# Altium PCB esp32h2_light_sleep.PcbDoc
Units mm, origin at the board's own origin, x right, y up, seen from the top; angles counter-clockwise.
Board outline 39 x 125 mm, 2 copper layers (Top Layer, Bottom Layer); 49 components, 36 nets, 151 pads, 0 vias.
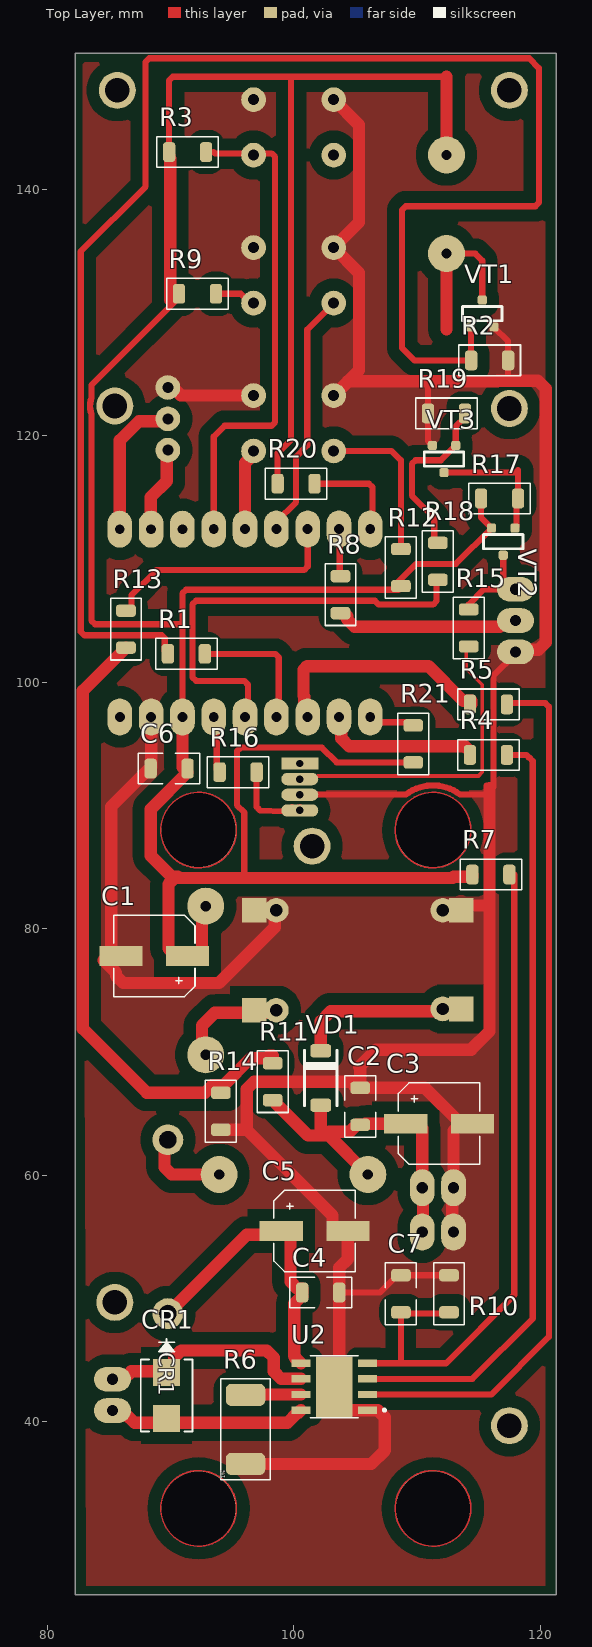
[diagram p0: Top Layer view]
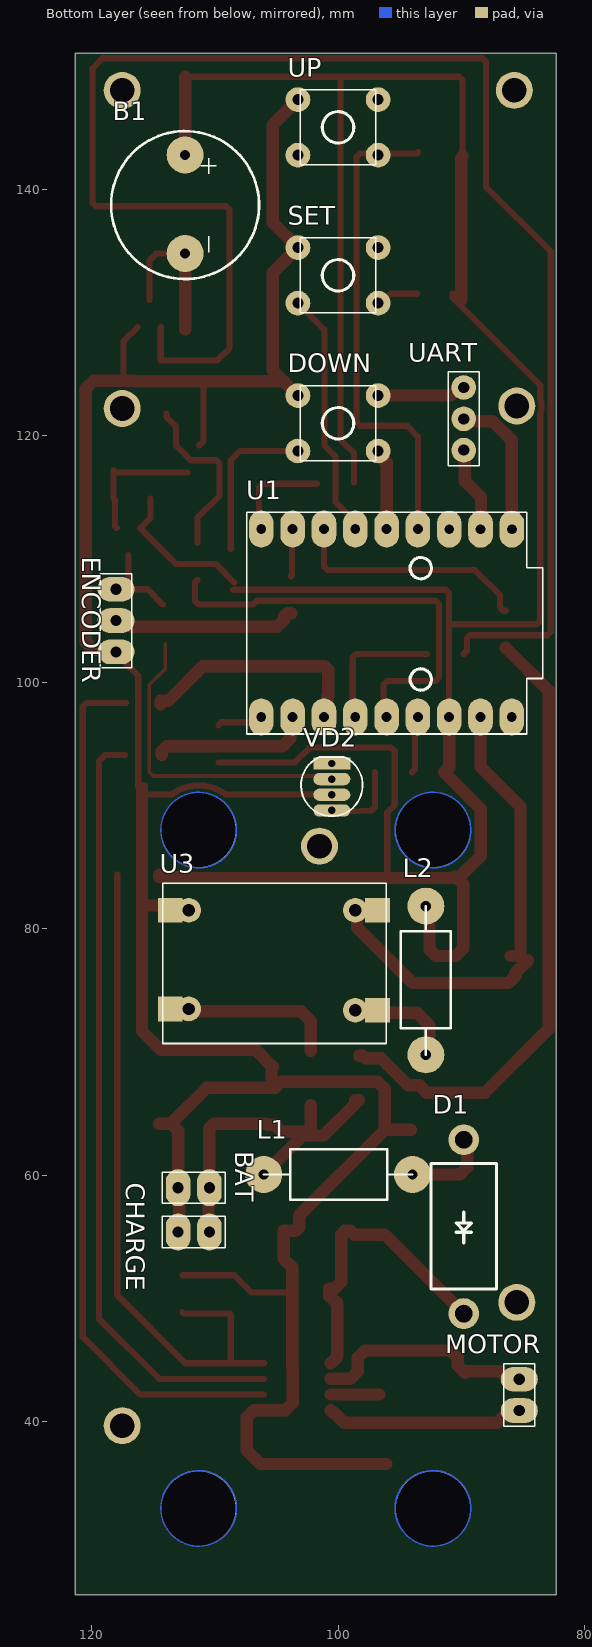
[diagram p1: Bottom Layer view, seen from below]
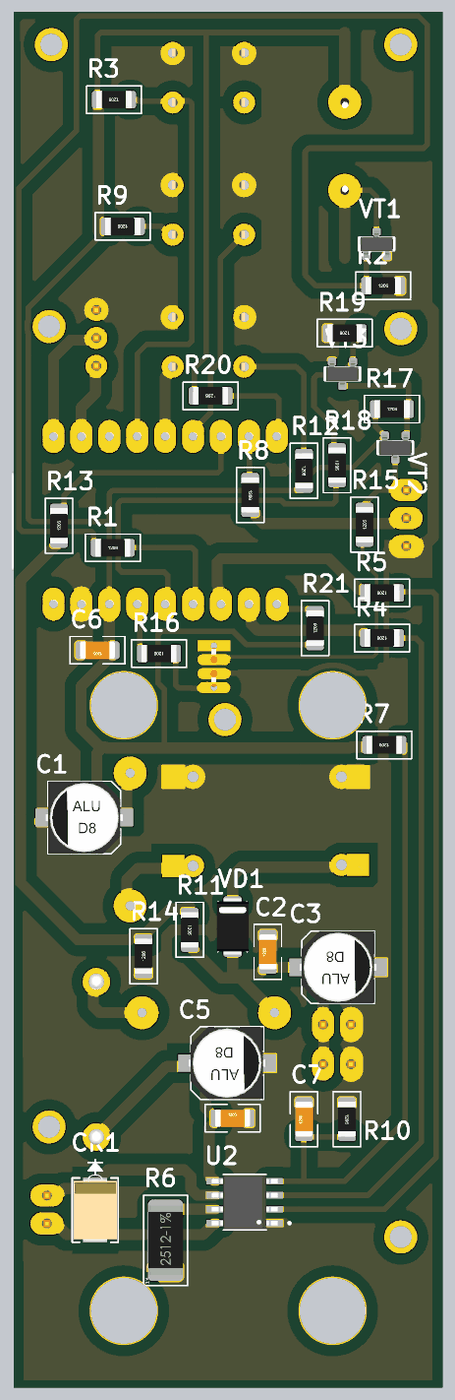
[diagram p2: 3D render of the assembled board from above, using the file's embedded part models]
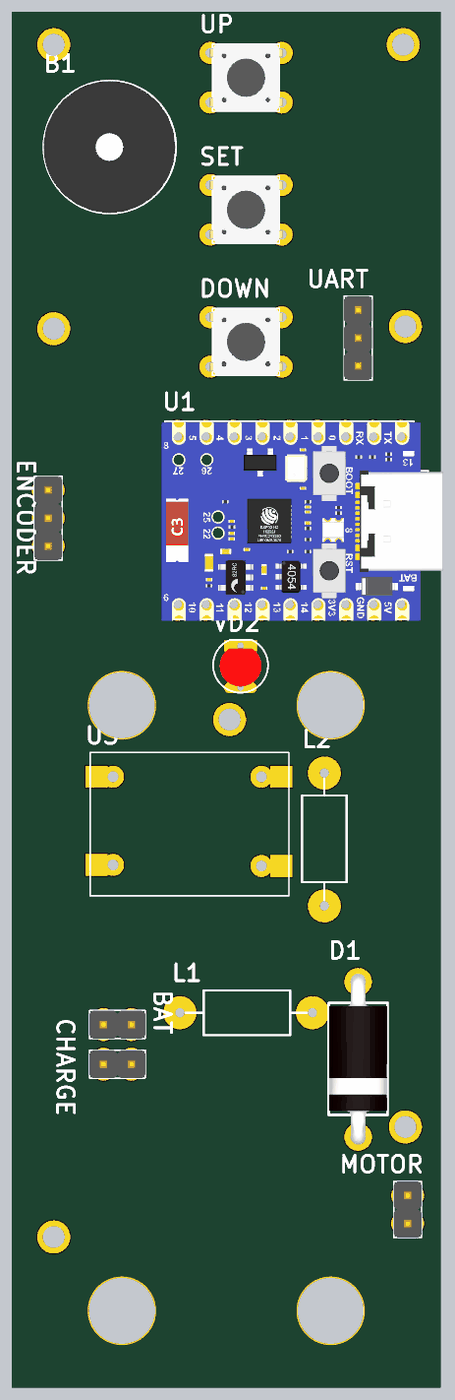
[diagram p3: 3D render of the assembled board from below, using the file's embedded part models]

## Layer stack, top to bottom
Top Solder: solder mask 0.0102, Solder Resist, Dk 3.5
Top Layer: signal copper 0.0356
Dielectric 1: dielectric 0.32, FR-4, Dk 4.8
Bottom Layer: signal copper 0.0356
Bottom Solder: solder mask 0.0102, Solder Resist, Dk 3.5

## Board outline
82.3,26 82.3,151 121.3,151 121.3,26

## Design rules (kind name [scope] priority, off if disabled: settings)
Clearance [All] p1: gap=0.254 ignorepadtopadclearanceinfootprint=FALSE except(1: Arc-Fill Arc-Poly Arc-Region Track-Fill Track-Poly Track-Region SMDPad-Fill SMDPad-Poly SMDPad-Region THPad-Fill THPad-Poly THPad-Region Via-Fill Via-Poly Via-Region Fill-Fill Fill-Poly Fill-Region Poly-Poly Poly-Region Region-Region)
PolygonConnect [All] p1: connectstyle=Direct reliefconductorwidth=0.254 reliefentries=4 polygonreliefangle="90 Angle" airgapwidth=0.254
RoutingVias [All] p1: holewidth=0.711 width=1.27 viastyle="Through Hole" minholewidth=0.711 minwidth=1.27 maxholewidth=0.711 maxwidth=1.27
SolderMaskExpansion [All] p1: expansion=0.102 istentingtop=FALSE
SupplyNets "Schematic Supply Nets" [InNet('GND')] p1: voltage=0.000
Width [All] p1: maxlimit=1 minlimit=0.254 preferedwidth=0.5 bottomlayer_maxwidth=0.254 bottomlayer_prefwidth=0.254 minimp=50.000000 maximp=50.000000 favimp=50.000000
30 further rules are at their usual default settings.

## Components (designator, comment, footprint, x,y, rotation, side; value= is the part's Value field where it differs from the comment)
B1 "Пищалка2TMB12A01" Buzzer_TMB12AXX 112.4,138.7 r270 bottom value=TMB12A01
BAT "H-1x2" J1x2 111.7,59 r180 bottom
C1 "100u" "EL SMD Case D D6.3x6.6 h7.7(0605)" 88.7,77.8 r180 top
C2 "100n" C1206(3216) 105.4,65.6 r90 top
C3 "100u" "EL SMD Case D D6.3x6.6 h7.7(0605)" 111.8,64.2 r0 top
C4 "100n" C1206(3216) 102.2,50.5 r0 top
C5 "100u" "EL SMD Case D D6.3x6.6 h7.7(0605)" 101.7,55.5 r0 top
C6 "100n" C1206(3216) 89.9,93 r180 top
C7 "100n" C1206(3216) 108.7,50.4 r90 top
CHARGE "H-1x2" J1x2 111.7,55.4 r180 bottom
CR1 "SMBJ15CA" DIODE_DO214AA 89.7,42.146 r270 top
D1 "1N5822" DO201AD 89.8,55.9 r0 bottom
DOWN "TS-06" TS-06 100,121 r270 bottom
ENCODER "H-1x3" J1x3#1 118,105 r90 bottom
L1 "" AXIAL-10x0.8 99.8,60.2 r180 bottom value=10mH
L2 "Inductor" AXIAL-10x0.8 93,76 r90 bottom value=10mH
MOTOR "H-1x2" J1x2 85.3,42.2 r90 bottom
R1 "100" R1206 91.3,102.3 r0 top
R2 "100k" R1206 115.9,126.1 r0 top
R3 "100k" R1206 91.4,143 r180 top
R4 "1k" R1206 115.8,94.1 r180 top
R5 "1k" R1206 115.8,98.2 r180 top
R6 "0.2" R2512-1% 96.1,39.4 r90 top
R7 "220k" R1206 116,84.4 r180 top
R8 "100" R1206 103.8,107.1 r270 top
R9 "100k" R1206 92.2,131.5 r180 top
R10 "100k" R1206 112.6,50.4 r270 top
R11 "1M" R1206 98.3,67.6 r270 top
R12 "100k" R1206 108.7,109.3 r270 top
R13 "1k" R1206 86.4,104.3 r90 top
R14 "47k" R1206 94.1,65.2 r90 top
R15 "0" R1206 114.2,104.4 r90 top
R16 "1k" R1206 95.5,92.7 r180 top
R17 "100k" R1206 116.7,114.9 r0 top
R18 "1k" R1206 111.7,109.8 r270 top
R19 "100k" R1206 112.4,121.8 r180 top
R20 "10k" R1206 100.2,116.1 r180 top
R21 "100k" R1206 109.7,95 r90 top
SET "TS-06" TS-06 100,133 r270 bottom
U1 "ESP32-H2_SuperMini" ESP32-H2_SuperMini 95.8,104.8 r270 bottom
U2 "DRV8870DDAR" VREG_LM5017MR/NOPB 103.3,42.865 r180 top
U3 "S08 DC-DC module" "S08 DC-DC module" 106.2,71.7 r180 bottom
UART "H-1x3" J1x3#2 89.8,121.36 r270 bottom
UP "TS-06" TS-06 100,145 r270 bottom
VD1 "SS14" SMA 102.2,67.9 r0 top
VD2 "XT1511-4020" "WS2812D-F5 DIP 4 pin" 100.5,92.14 r270 bottom value=WS2812D-F5
VT1 "IRLML2402TR" SOT-23 115.3,129.9 r0 top
VT2 "IRLML2244" SOT-23 117,111.4 r180 top
VT3 "IRLML2402TR" SOT-23 112.2,118.1 r180 top

## Footprints (in the part's own frame and the unit in brackets; to place one, negate y for a bottom-side part, rotate by r counter-clockwise, add the part's x,y. Pads: shape width x height; smd on the part's side, far side on the other; paste and mask are expansions set on the pad)
AXIAL-10x0.8 [mm] "Axial Device, Thru-Hole; 2 Leads; 0.8 in Pin Spacing"
  round 3 hole 0.85: 1(-6.223,-0.127) 2(5.842,-0.127)
  silkscreen extent -6.22,-2.16 5.84,1.91
Buzzer_TMB12AXX [mm] "Buzzer, Body o12mm h10mm x 8mm"
  round 3 hole 0.8: 1(-4.064,0) 2(3.937,0)
  silkscreen extent -6,-6 6,6, body extent -6,-6.03 6,5.97, height 9.51
C1206(3216) [mm]
  rrect50% 1x1.6 smd: 1(-1.5,0) 2(1.5,0)
  silkscreen extent -2.5,-1.25 2.5,1.25, body extent -1.6,-0.8 1.6,0.8, height 1
DIODE_DO214AA [mil]
  rect 86x86 smd paste+0 mask+0: 1(-73,0) 2(73,0)
  silkscreen extent -180,-83 115,83, body extent -110,-77 110,77, height 98
DO201AD [mm] "DO201AD"
  round 2.5 hole 1.4 slot 1.405 at 90 deg: 1(0,-6.985) 2(0,7.112)
  silkscreen extent -2.67,-5.06 2.67,5.1, body extent -2.64,-7.73 2.64,7.73, height 5.65
"EL SMD Case D D6.3x6.6 h7.7(0605)" [mm]
  rect 3.5x1.6 smd mask+0.102: 1(-2.7,0) 2(2.7,0)
  silkscreen extent -3.3,-3.3 3.3,3.3, body extent -3.5,-3.3 3.5,3.3, height 7.7
ESP32-H2_SuperMini [mm]
  oval 3x2 hole 0.8: 0(-7.606,4.82) 1(-7.62,2.28) 2(-7.62,-0.26) 3(-7.62,-2.8) 3.3(7.613,4.815) 4(-7.62,-5.34) 5(-7.62,-7.88) 5V(7.613,9.895) 8(-7.62,-10.42) 9(7.62,-10.42) 10(7.62,-7.88) 11(7.62,-5.34) 12(7.62,-2.8) 13(7.62,-0.26) 14(7.62,2.28) 23(-7.606,7.36) 24(-7.606,9.9) G(7.613,7.355)
  silkscreen extent -9,-11.6 9,12.4, body extent -8.89,-11.9 9.11,13.67, height 4.53
J1x2 [mm]
  oval 2x3 hole 0.9: 1(-1.27,0) 2(1.27,0)
  silkscreen extent -2.54,-1.27 2.54,1.27, body extent -2.54,-1.27 2.54,1.27, height 10.1
J1x3#1 [mm]
  oval 2x3 hole 0.9: 1(-2.54,0) 2(0,0) 3(2.54,0)
  silkscreen extent -3.81,-1.27 3.81,1.27, body extent -3.81,-1.27 3.81,1.27, height 10.1
J1x3#2 [mm]
  round 2 hole 0.9: 1(-2.54,0) 2(0,0) 3(2.54,0)
  silkscreen extent -3.81,-1.27 3.81,1.27, body extent -3.81,-1.27 3.81,1.27, height 10.1
R1206 [mm]
  rrect50% 1x1.6 smd: 1(-1.5,0) 2(1.5,0)
  silkscreen extent -2.5,-1.25 2.5,1.25, body extent -1.6,-0.8 1.6,0.8, height 0.6
R2512-1% [mm]
  rrect50% 1.8x3.2 smd: 1(-2.8,0) 2(2.8,0)
  silkscreen extent -4.1,-2 4.1,2, body extent -3.16,-1.6 3.16,1.6, height 0.62
"S08 DC-DC module" [mm]
  rect 2x2 all layers, no hole: 1(-7.4,9.8) 2(-7.4,1.8) 3(9.4,1.7) 4(9.4,9.8)
  round 2 hole 1: 1(-5.9,9.8) 2(-5.9,1.8) 3(7.6,1.7) 4(7.6,9.8)
  silkscreen extent -8,-1 10.1,12
SMA [mm] "SMA; 2 Leads"
  rrect50% 1.7x1.1 smd: 1(0,-2.2) 2(0,2.2)
  silkscreen extent -1.32,-2.25 1.32,2.25, body extent -1.46,-2.63 1.46,2.65, height 2.41
SOT-23 [mm] "SOT23, 3-Leads, Body 2.9x1.3mm, Pitch 0.95mm, Lead Span 2.3mm - Reverse Pinning, IPC Medium Density"
  rrect50% 0.75x0.75 smd: 1(-0.95,-1.1) 2(0.95,-1.1) 3(0,1.1)
  silkscreen extent -1.6,-0.58 1.6,0.58, body extent -1.46,-1.25 1.46,1.23, height 1.01
TS-06 [mm]
  round 2 hole 0.9: 1(-2.25,-3.25) 1(-2.25,3.25) 2(2.25,-3.25) 2(2.25,3.25)
  silkscreen extent -3.05,-3.05 3.05,3.05, body extent -3,-3.3 3,3.3, height 3.95
VREG_LM5017MR/NOPB [mm]
  rrect5% 1.55x0.6 smd mask+0: 1(-2.7,1.905) 2(-2.7,0.635) 3(-2.7,-0.635) 4(-2.7,-1.905) 5(2.7,-1.905) 6(2.7,-0.635) 7(2.7,0.635) 8(2.7,1.905)
  rect 2.95x4.9 smd paste-3 mask+0: 9(0,0)
  silkscreen extent -4.17,-2.52 1.95,2.52, body extent -3,-2.45 3,2.45, height 1.7
"WS2812D-F5 DIP 4 pin" [mm] "WS2812D-F5 4 leads (DOUT, VDD, GND, DIN)"
  rect 1x3 hole 0.6 mask+0.05: 1(-1.27,0)
  oval 1x3 hole 0.6 mask+0.05: 2(0,0) 3(1.27,0) 4(2.54,0)
  silkscreen extent -1.8,-2.5 3,2.5, body extent -1.05,-1.9 2.45,1.9, height 6.5

## Part data
B1: library part B, "Active Buzzer 1.5/3.0V 75DB", Contacts=2, Family=Пищалка, Montage=Выводной
C1 C3 C5: library part "EL 100u/35V-2", "EL 35V SMD Case D D6.3x6.6 h7.7(0605)", Price=0.014
C2 C4 C6 C7: library part C-1206, "SMD-1206", Price=0.014
CR1: "Description", Manufacturer_Name="Bourns Electronics", Copyright="Copyright (C) 2026 Ultra Librarian. All rights reserved.", Manufacturer_Part_Number=SMBJ15CA
D1: "Diode Schottky 40V 3A DO201AD", JLCPCB PN=C3018526, Digikey PN=497-11370-1-ND, Mouser PN=511-1N5822
DOWN SET UP: library part "Buton TS-06", Price=0.15
L1: library part Inductor, "Inductor", Code_IEC=1005, Code_JEITA=0402, LatestRevisionDate=29-May-2009, LatestRevisionNote="IPC-7351 Footprint Added.", PackageDescription="Chip Inductor", PackageReference=0402-A, Published=8-Jun-2000, Publisher="Altium Limited"
R1 R2 R3 R4 R5 R7 R8 R9 R10 R11 R12 R13 R14 R15 R16 R17 R18 R19 R20 R21: library part R-1206, "SMD 1206 0.125W 5% 200V", Price=0.045
R6: library part R-2512-1%, "SMD 2512 1W 1% 200V", Price=0.288
U1: "Zero ESP32-H2 board", Package=Package, Check_prices=https://www.snapeda.com/parts/ESP32-C3%20SuperMini_TH/Espressif+Systems/view-part/?ref=eda, MF="Espressif Systems", MP="ESP32-C3 Zero"
U2: "å…·æœ‰ç”µæµè°ƒèŠ‚åŠŸèƒ½çš„ 50 Vã€3.6 A H æ¡¥ç”µæœºé©±åŠ¨å™¨", Package="HSOIC-8 Texas Instruments", Check_prices=https://www.snapeda.com/parts/DRV8870DDAR/Texas+Instruments/view-part/?ref=eda, MF="Texas Instruments", MP=DRV8870DDAR, SnapEDA_Link=https://www.snapeda.com/parts/DRV8870DDAR/Texas+Instruments/view-part/?ref=snap
U3: "S08 DC-DC module V5.0", Package=Package, Check_prices=https://www.snapeda.com/parts/ESP32-C3%20SuperMini_TH/Espressif+Systems/view-part/?ref=eda, MF="Espressif Systems", MP="ESP32-C3 Zero"
VD1: library part VD_8, "DIODE SMD Шоттки SS14 1A 40v SMA", Current=1A, Manufacturer="Diodes Inc.", Package=SMA, Voltage=20v, Family=Диод, Montage=SMD, Type=Шоттки
VD2: library part WS2812D-F5, "DIP RGB Адресуемый светодиод аналог WS2812", Current=0.005A, Manufacturer=EZIUSIN, Package=4020, Voltage=2.0/3.0v, Family="Диод RGB", Montage=SMD, PartNumber=XT1511-4020, Type=Светодиод, Vender=https://ru.aliexpress.com/store/product/Jercio-50-1500-XT1511-4020-WS2812b-SK6812-4020-RGB-DC-5/4170004_32890356895.html?ws_ab_test=searchweb0_0%2Csearchweb201602_1_5724111_10065_5930011_10068_5724211_5890011_5724311_10696_5724011_10084_10083_10618_5940011_5970011_10307_5723511_10301_5920011_5910011_5724411_10059_5900011_100031_5725111_10103_5724811_5725011_5990011_5724911_5980011%2Csearchweb201603_56%2CppcSwitch_2&algo_expid=625c825e-e2ae-42fa-880c-28dc549fd929-13&algo_pvid=625c825e-e2ae-42fa-880c-28dc549fd929&transAbTest=ae803_1&priceBeautifyAB=0
VT1 VT3: library part VT_2, "TRANSISTOR SMD MOSFET IRLML0040 3.6A 40v 0.078Ω SOT23", Current=3.6A, Manufacturer="International Rectifier", Package=SOT23, Resistance=0.078Ω, Voltage=40v, Family=Транзистор, Montage=SMD, Structure=N-channel, Type=MOSFET
VT2: library part VT_5, "FET-P SMD IRLML6402 3.7A 20v 0.065Ω SOT23", Current=3.7A, Manufacturer="International Rectifier", Package=SOT23, Resistance=0.065Ω, Voltage=20v, Family=Транзистор, Montage=SMD, Structure=P-channel, Type=MOSFET
BAT CHARGE MOTOR: Price=0.02
ENCODER UART: Price=0.03
L2: Code_IEC=1005, Code_JEITA=0402, LatestRevisionDate=29-May-2009, LatestRevisionNote="IPC-7351 Footprint Added.", PackageDescription="Chip Inductor", PackageReference=0402-A, Published=8-Jun-2000, Publisher="Altium Limited"

## Free pads (board coordinates)
  round 3 hole 2: 99(85.5,49.7) 99(85.5,122.4) 99(85.7,148) 99(101.5,86.7) 99(117.5,39.7) 99(117.5,122.2) 99(117.5,148)
  round 6 hole 6: 99(92.3,33) 99(92.3,88) 99(111.3,33) 99(111.3,88)

## Nets (pads, with @x,y where several pads share a name; then routed paths per layer and width w, separated by ;. In a path a pad name is that pad's centre, name@x,y a point inside that pad or via, vN(x,y) a via of type N, cw(c..) or ccw(c..) an arc to the next point about the centre after c; other vN are vias at no path point)
GND: BAT.1 C1.2 C2.2 C3.2 C4.2 C5.2 C6.2 C7.2 CHARGE.1 DOWN.1 ENCODER.1 R2.2 R6.1 R10.1 R14.1 R19.2 SET.1 U1.G U2.1 U2.9 U3.1 U3.4 UART.1 UP.1 VD2.3 VT1.2 VT3.2 | length 278.2
  Top Layer w0.5: VD2.3@100.546,90.9 109.115,90.9 cw(c111.3,88) 113.485,90.9 115.893,90.9 ; C4.2 107,50.5 108.4,51.9 C7.2 R10.1 ; 110.9,124.4 R19.2 110.9,119.55 VT3.2 ; 115.662,91.631 115.893,91.4 ; 116.2,91.5 116.2,100.517 ENCODER.1@118,102.317 ; VT1.2 117.4,127.65 R2.2 117.4,124.454
  Top Layer w1: C1.2@84.6,77.443 85.6,76.443 85.6,76.186 86.186,75.6 93.952,75.6 98.458,80.106 98.458,81.427 U3.4@98.6,81.568 ; C1.2 85.5,77.8 85.2,78.1 85.2,89.9 88.445,93.145 U1.G ; UART.1 90.206,123.9 90.856,123.25 DOWN.1@96.75,123.25 ; R14.1 96.2,63.7 ; R6.1 106.3,36.6 107.4,37.7 107.4,40.374 106.814,40.96 U2.1 104.275,40.96 103.676,41.559 103.676,44.383 103.7,44.407 C4.2 103.7,52.525 104.4,53.225 C5.2 103.45,55.5 103.15,55.8 103.15,56.75 96.2,63.7 ; DOWN.1@103.25,123.25 104.4,124.4 ; UP.1@103.25,147.25 105.3,145.2 105.3,137.3 103.25,135.25 105.3,133.2 105.3,125.3 104.4,124.4 ; U3.1@111.7,81.5 113.6,81.5 113.993,81.893 115.893,81.893 ; CHARGE.1@112.87,55.5 112.87,58.9 BAT.1 112.97,63.62 C3.2@113.55,64.2 ; C3.2 C3.2@113.55,64.2 ; 115.893,91.4 115.893,90.9 115.893,81.893 ; ENCODER.1@118,102.317 ENCODER.1 118.169,102.629 119.866,102.629 120.452,103.215 120.452,123.814 119.812,124.454 117.4,124.454 116.566,124.454 116.512,124.4 110.9,124.4 104.4,124.4 ; 96.2,63.7 96.2,67.014 96.786,67.6 104.6,67.6 105.1,67.1 C2.2 ; C2.2 105.4,68.7 105.3,68.8 106.7,70.2 114.4,70.2 115.893,71.693 115.893,81.893 ; C2.2 110.65,67.1 C3.2@113.55,64.2
NetB1_1: B1.1 C1.1 C6.1 L2.2 R3.2 R7.2 R9.2 R12.2 R17.1 R20.2 R21.1 U1.3.3 VT2.2 | length 235.6
  Top Layer w0.5: R3.2 89.9,148.814 90.193,149.107 99.8,149.107 ; R9.2 90.7,131.2 83.6,124.1 83.6,123.037 ccw(c85.5,122.4) 83.6,121.763 83.6,104.993 83.893,104.7 90.985,104.7 ; U1.3.3 90.985,104.7 ; 96,84.119 96,89.435 95.4,90.035 95.4,94.407 95.693,94.7 102.3,94.7 103.5,93.5 R21.1 ; R20.2@98.7,116.204 98.7,118.573 99.8,119.673 99.8,149.107 ; R12.2@108.417,108.083 109.934,109.6 113.15,109.6 VT2.2 115.2,113.35 R17.1 ; R12.2@108.5,107.5 91.278,107.5 90.985,107.207 90.985,104.7 ; 112.4,149.107 99.8,149.107
  Top Layer w1: R3.2@89.9,142.717 89.9,142.554 90,142.454 90,131 ; U1.3.3 90.985,93.115 91.4,92.7 88.419,89.719 88.419,85.916 90.107,84.228 90.425,84.228 90.444,84.209 ; L2.2@92.573,82.742 92.573,78.323 92.05,77.8 C1.1 90.45,77.8 89.85,78.4 89.85,83.624 90.436,84.209 90.444,84.209 ; B1.1 112.4,149.107 ; R7.2 114.5,84.209 112.998,84.209 112.908,84.119 96,84.119 90.692,84.119 90.602,84.209 90.444,84.209
NetB1_2: B1.2 VT1.3 | length 12
  Top Layer w0.5: B1.2 114.737,134.763 115.3,134.2 VT1.3
  Top Layer w1: 112.4,128.6 112.4,133.422 B1.2@112.4,134.285
NetBAT_2: BAT.2 C2.1 C3.1 CHARGE.2 L1.1 R11.2 VD1.1 | length 29.3
  Top Layer w1: R11.2 98.6,66.1 98.6,65.8 101.168,63.232 102.2,63.232 ; VD1.1 102.2,63.232 ; 102.864,63.532 104.532,63.532 105.1,64.1 C2.1 105.7,64.1 105.8,64.2 C3.1 110.05,64.2 110.43,63.82 BAT.2 110.33,58.9 110.33,58.05 110.5,57.88 110.5,56.52 110.33,56.35 CHARGE.2@110.33,55.5 ; L1.1@105.998,60.098 102.864,63.232 102.2,63.232
NetC4_1: C4.1 C5.1 D1.2 U2.5 | length 24.2
  Top Layer w1: D1.2 96.208,55.196 97.164,55.196 97.169,55.2 98.7,55.2 C5.1 99.441,55.5 99.741,55.2 99.741,51.386 100.327,50.8 100.7,50.8 C4.1 ; U2.5 100.4,44.97 100.325,44.97 100.125,45.17 100.125,45.285 100.054,45.356 100.054,49.614 100.64,50.2 C4.1@100.7,50.2
NetC7_1: C7.1 R7.1 R10.2 U2.4 | length 56.3
  Top Layer w0.5: U2.4 108.83,44.77 ; R10.2 112.5,48.8 108.8,48.8 108.7,48.7 108.7,44.9 108.83,44.77 ; R7.1@117.9,84.4 117.9,50.3 112.37,44.77 108.83,44.77
NetCR1_1: CR1.1 MOTOR.2 U2.6 | length 18.3
  Top Layer w1: MOTOR.2 86.206,43.47 86.843,44.107 CR1.1@89.7,44.107 ; CR1.1 90.292,44.592 90.292,45.214 90.878,45.8 97.814,45.8 98.4,45.214 98.4,44.1 99,43.5 U2.6
NetCR1_2: CR1.2 MOTOR.1 U2.8 | length 16.1
  Top Layer w1: MOTOR.1 86.071,40.93 86.571,40.43 86.612,40.43 87.108,39.935 99.5,39.935 100.325,40.76 100.4,40.76 U2.8
NetD1_1: D1.1 L1.2 | length 7.5
  Top Layer w1: D1.1 89.527,62.612 89.527,60.659 90.113,60.073 L1.2@94.476,60.073
NetDOWN_2: DOWN.2 R12.1 U1.2 | length 19.8
  Top Layer w0.5: DOWN.2@103.25,118.75 107.95,118.75 108.7,118 R12.1
  Top Layer w1: U1.2 96.06,117.789 96.75,118.479 96.75,118.75 DOWN.2@96.625,118.875
NetENCODER_2: ENCODER.2 R8.2 | length 15
  Top Layer w1: R8.2 104.1,105.6 104.35,105.35 104.35,105.093 104.943,104.5 116.729,104.5 117.229,105 ENCODER.2
NetENCODER_3: ENCODER.3 R15.2 VT2.3 | length 7.5
  Top Layer w0.5: R15.2@114.2,106.3 115.44,107.54 ENCODER.3 117.906,107.54 117,108.446 VT2.3
NetL2_1: L2.1 U3.3 | length 7.7
  Top Layer w1: L2.1@92.573,70.677 92.573,72.157 93.616,73.2 U3.3@98.4,73.2
NetR1_1: R1.1 R2.1 VT1.1 | length 131.3
  Top Layer w0.5: R1.1 89.55,102.55 89.55,103.561 89.307,103.804 83.035,103.804 82.742,104.097 82.742,134.942 88,140.2 88,150.307 88.293,150.6 119.107,150.6 119.9,149.807 119.9,138.893 119.607,138.6 109.093,138.6 108.8,138.307 108.8,127.1 109.8,126.1 R2.1 114.375,126.125 114.375,128.775 VT1.1
NetR1_2: R1.2 U1.12 | length 11
  Top Layer w0.5: R1.2 98.507,102.3 98.8,102.007 98.8,97.38 U1.12
NetR3_1: R3.1 U1.1 UP.2 | length 39.8
  Top Layer w0.5: 93.5,143 93.625,142.875 96.625,142.875 UP.2@96.75,142.75 ; U1.1 93.52,119.92 94.4,120.8 98.207,120.8 98.5,121.093 98.5,142.6 98.207,142.893 96.732,142.893 UP.2@96.687,142.937
NetR4_1: R4.1 U2.3 | length 62.9
  Top Layer w0.5: U2.3 114.5,43.5 119.388,48.388 119.388,93.607 119.096,93.9 119.074,93.9 118.874,94.1 R4.1
NetR4_2: R4.2 U1.10 | length 13
  Top Layer w1: U1.10 103.871,96.989 103.871,95.436 104.507,94.8 113.9,94.8 114.3,94.4 R4.2
NetR5_1: R5.1 U2.2 | length 71.4
  Top Layer w0.5: U2.2 116.03,42.23 120.7,46.9 120.7,98.007 120.407,98.3 R5.1@117.2,98.3
NetR5_2: R5.2 U1.11 | length 19.1
  Top Layer w1: U1.11 100.871,97.449 100.871,98.829 100.8,98.9 100.8,101.007 101.093,101.3 110.944,101.3 113.744,98.5 114.4,98.5 R5.2@114.4,98.2
NetR6_2: R6.2 U2.7 | length 3.9
  Top Layer w1: R6.2@96.663,42.23 U2.7
NetR8_1: R8.1 U1.5 | length 3.9
  Top Layer w0.5: U1.5 103.74,112.36 103.74,108.66 R8.1
NetR9_1: R9.1 SET.2 U1.3 | length 23.7
  Top Layer w0.5: R9.1@93.594,131.5 95.707,131.5 96.457,130.75 SET.2@96.75,130.75 ; U1.3 98.6,113.006 100.2,114.606 100.2,118.3 101.1,119.2 101.1,128.6 SET.2@103.25,130.75
NetR11_1: R11.1 R13.1 R14.2 | length 51.2
  Top Layer w1: R13.1 82.9,99.3 82.9,71.9 88.1,66.7 92.814,66.7 93.4,67.286 93.4,67.3 94.3,67.3 96.5,69.5 97.8,69.5 98,69.7 98.3,69.7
NetR13_2: R13.2 U1.4 | length 19.8
  Top Layer w0.5: R13.2 86.6,105.8 86.85,106.05 86.85,107.05 88.9,109.1 100.847,109.1 101.14,109.393 U1.4
NetR15_1: R15.1 VD2.2 | length 26
  Top Layer w0.3: VD2.2 101.689,92.14 101.949,92.4 114.989,92.4 115.304,92.715 115.304,99.796 114,101.1 R15.1@114,103.1
NetR16_1: R16.1 VD2.4 | length 7.7
  Top Layer w0.5: R16.1 97,89.879 97.146,89.733 97.285,89.594 99.192,89.525 99.468,89.525 99.926,89.558 VD2.4 100.404,89.641 VD2.4@99.874,89.866 ; VD2.4@99.915,89.71 VD2.4@100.5,89.866
NetR16_2: R16.2 U1.14 | length 4.7
  Top Layer w0.5: U1.14 93.76,96.94 93.76,92.94 R16.2
NetR17_2: R17.2 VT2.1 VT3.3 | length 10.9
  Top Layer w0.5: VT3.3 118,117 118.2,117.2 R17.2 118.075,114.775 118.075,112.625 VT2.1
NetR18_1: R18.1 R19.1 VT3.1 | length 14.2
  Top Layer w0.5: R18.1@111.4,111.3 111.4,113.332 109.6,115.132 109.6,117.707 109.893,118 111.95,118 VT3.1 113.15,120.75 113.9,121.5 R19.1
NetR18_2: R18.2 U1.13 | length 35.4
  Top Layer w0.5: U1.13 96.3,97.42 96.3,99.807 96.007,100.1 92.089,100.1 91.796,100.393 91.796,106.311 92.089,106.604 106.596,106.604 106.904,106.296 111.307,106.296 111.6,106.589 111.6,108.1 R18.2@111.4,108.3
NetR20_1: R20.1 U1.8 | length 8.3
  Top Layer w0.5: R20.1 106.107,116.1 106.4,115.807 106.4,112.6 U1.8
NetR21_2: R21.2 U1.9 | length 3.8
  Top Layer w0.5: U1.9 106.65,96.75 109.45,96.75 R21.2
NetU1_23: U1.23 UART.3 | length 7
  Top Layer w1: U1.23 88.4,112.446 88.4,115 89.72,116.32 89.72,118.74 UART.3
NetU1_24: U1.24 UART.2 | length 11.8
  Top Layer w1: U1.24 85.9,119.612 87.456,121.169 89.609,121.169 UART.2
NetU3_2: U3.2 VD1.2 | length 11.9
  Top Layer w1: VD1.2 102.2,72.5 103,73.3 110.929,73.3 110.938,73.309 111.391,73.309 U3.2@111.4,73.3
pads on no net: U1.0 U1.5V VD2.1

## Polygon pours and split planes (outlines as drawn)
GND on Top Layer "GND_L01_P000" (solid, pour order 0): 82.882,150.3 120.4,150.3 120.4,26.7 83.182,26.7

## Other copper
Multi-Layer:
  circle w0.254: c92.3,88 r3
  circle w0.254: c111.3,88 r3
  circle w0.254: c92.3,33 r3
  circle w0.254: c111.3,33 r3

## Silkscreen, mask and mechanical layers (free items; w line width, h text height)
Mechanical 1:
  lines w0.254: 82.5,26 82.5,151 121.1,151 121.1,26 82.5,26

## Dimensions
92.3,88 to 82.5,26 on Mechanical 15
111.3,88 to 121.1,151 on Mechanical 15
111.3,33 to 121.1,151 on Mechanical 15
92.3,33 to 82.5,151 on Mechanical 15
92.3,33 to 111.3,33 on Mechanical 15
92.3,88 to 111.3,88 on Mechanical 15

## Text inside footprints (layer, text, board x,y; h text height)
R6: Top Overlay "1%" at 94.576,35.438 h0.5 r90